# EAGLE board jha_sw (EAGLE 6.2)
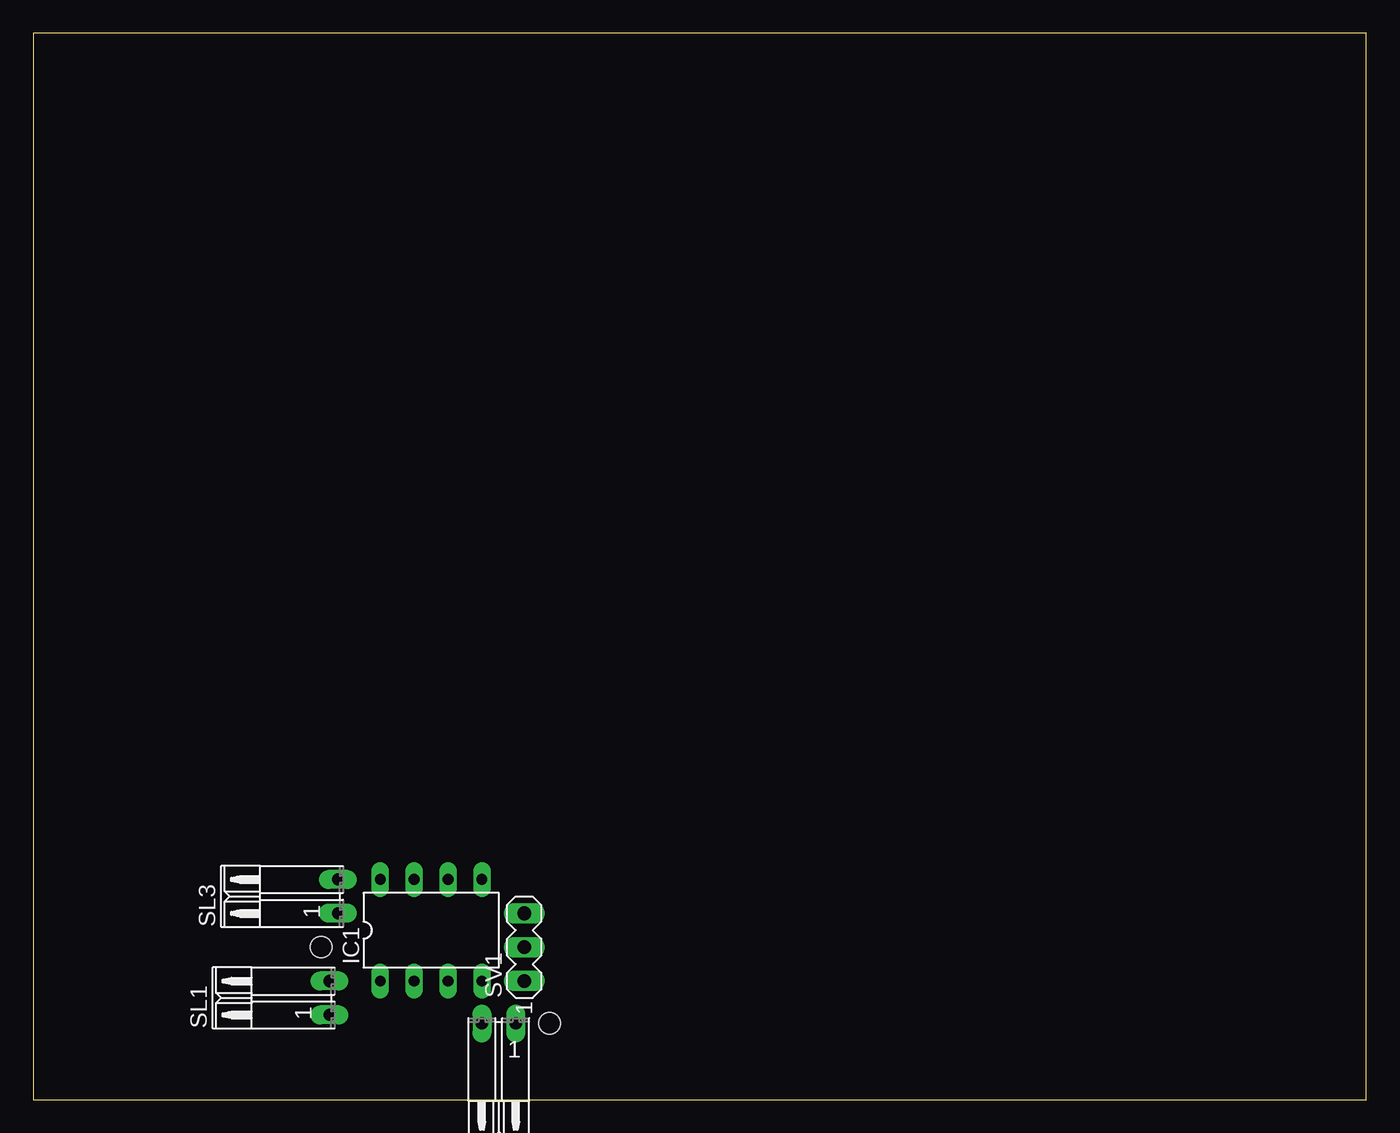
[diagram p0: board, top side]
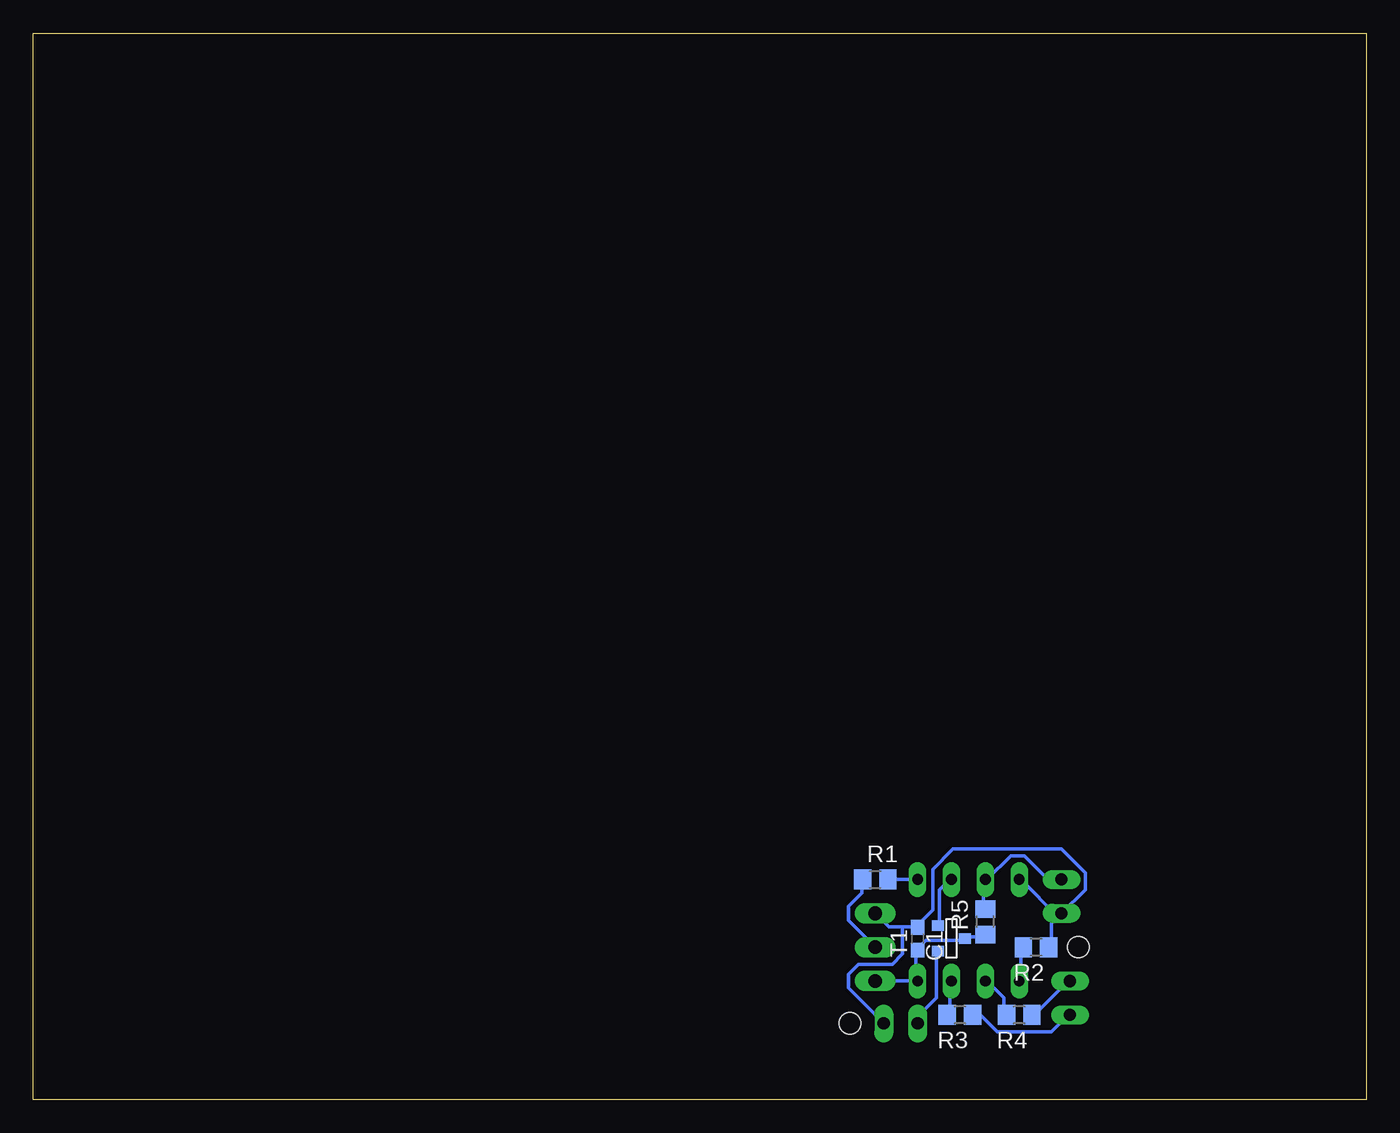
[diagram p1: board, bottom side, seen from below]

Size 100 x 80 mm. Coordinates in mm from the lower left corner, seen from the top.
Outline: 0,0 100,0 100,80 0,80 0,0
Copper layers (1*16): Top 0.035mm / dielectric 1.5mm / Bottom 0.035mm
Design rules: minimum track width 10mil, minimum drill 24mil, track to track 8mil, track to pad 8mil, pad to pad 8mil, via to via 8mil, smd to smd 8mil, copper to edge 40mil, drill to drill 8mil, minimum pad ring 10mil, minimum via ring 8mil, stop-mask expansion 4mil, vias tented up to drill 0mil, thermal gap 10mil
Holes 1.6 mm at 21.59,11.43 38.73,5.71

## Footprints (pad centres in the part's own frame; a part is rotated, then mirrored left to right if it is on the bottom)
C0603 = smd 1.1 x 1: 1 -0.85,0; 2 0.85,0
DIL08 = drill 0.813 long: 1 -3.81,-3.81; 2 -1.27,-3.81; 3 1.27,-3.81; 4 3.81,-3.81; 5 3.81,3.81; 6 1.27,3.81; 7 -1.27,3.81; 8 -3.81,3.81
R0805 = smd 1.3 x 1.5: 1 -0.95,0; 2 0.95,0
02PA = drill 0.914 long: 1 -1.27,0; 2 1.27,0
MA03-1 = drill 1.016 long: 1 -2.54,0; 2 0,0; 3 2.54,0
SOT-23 = smd 0.787 x 0.889: 1 0.025,-1.016; 2 -0.94,1.016; 3 0.991,1.016

## Placement (x,y rotation side)
C1  100nF  [C0603]  33.66,12.06 270 bottom
IC1  TINY13-20PU  [DIL08]  29.84,12.7 0 top
R1  [R0805]  36.83,16.51 0 bottom
R2  [R0805]  24.77,11.43 180 bottom
R3  [R0805]  30.48,6.35 180 bottom
R4  [R0805]  26.04,6.35 180 bottom
R5  [R0805]  28.57,13.34 90 bottom
SL1  [02PA]  22.23,7.62 90 top
SL2  [02PA]  34.92,5.71 180 top
SL3  [02PA]  22.86,15.24 90 top
SV1  [MA03-1]  36.83,11.43 90 top
T1  [SOT-23]  31.11,12.06 90 bottom

## Library data of the parts
C1 R1-R5 = rcl
IC1 = atmel; MPN: ATTINY13-20PU; OC_FARNELL: 9171550; OC_NEWARK: 96K6521
SL1-SL3 = con-amp-quick; OC_FARNELL: unknown; OC_NEWARK: unknown
SV1 = con-lstb; OC_FARNELL: unknown; OC_NEWARK: unknown
T1 = zetex; OC_FARNELL: unknown; OC_NEWARK: unknown

## Nets
GND: C1.2 IC1.4 R5.1 SV1.1 T1.1
N$1: IC1.5 R1.2
N$2: R1.1 SV1.2
N$3: IC1.1 R2.2
N$4: IC1.3 R3.2
N$5: IC1.2 R4.2
N$6: R3.1 SL1.1
N$7: R4.1 SL1.2
N$8: IC1.6 T1.3
N$9: SL2.2 T1.2
N$10: IC1.7 R5.2 SL3.2
VCC: C1.1 IC1.8 R2.1 SL2.1 SL3.1 SV1.3

## Tracks (layer width: path | path; a pad name or v marks a point on that pad's centre or on a via)
GND
  Bottom 0.254: R5.1 28.7,12.19 29.97,12.19 T1.1 30.23,11.94 33.02,11.94 33.53,11.43 C1.2 33.78,11.18 33.78,8.89 | 33.78,8.89 SV1.1 | 33.78,8.89 IC1.4
N$1
  Bottom 0.254: IC1.5 R1.2
N$2
  Bottom 0.254: SV1.2 38.86,13.46 38.86,14.48 37.85,15.49 37.85,16.51 R1.1
N$3
  Bottom 0.254: R2.2 25.91,11.43 25.91,8.89 IC1.1
N$4
  Bottom 0.254: R3.2 31.24,6.35 31.24,8.89 IC1.3
N$5
  Bottom 0.254: R4.2 27.18,6.35 27.18,7.62 28.45,8.89 IC1.2
N$6
  Bottom 0.254: R3.1 28.96,6.35 27.69,5.08 23.62,5.08 22.35,6.35 SL1.1
N$7
  Bottom 0.254: R4.1 24.89,6.35 22.35,8.89 SL1.2
N$8
  Bottom 0.254: T1.3 32,13.21 32,15.75 31.24,16.51 IC1.6
N$9
  Bottom 0.254: T1.2 32.26,10.92 32.26,7.62 33.53,6.35 33.53,5.84 SL2.2
N$10
  Bottom 0.254: R5.2 28.7,14.48 28.7,16.51 IC1.7 28.45,16.51 26.67,18.29 25.65,18.29 23.88,16.51 SL3.2
VCC
  Bottom 0.254: 23.11,13.72 23.62,13.21 23.62,11.43 R2.1 | 23.11,13.72 25.91,16.51 IC1.8 | 23.11,13.72 SL3.1 21.08,15.75 21.08,17.02 22.86,18.8 30.99,18.8 32.51,17.27 32.51,14.22 33.78,12.95 | 34.8,12.95 35.81,12.95 SV1.3 | 34.8,12.95 33.78,12.95 | SL2.1 38.86,8.38 38.86,9.4 38.1,10.16 35.56,10.16 34.8,10.92 34.8,12.95 | 33.78,12.95 C1.1